# Altium PCB PCB.PcbDoc (part 1 of 2)
Units mm, origin at the board's own origin, x right, y up, seen from the top; angles counter-clockwise.
Board outline 86.36 x 54.61 mm, 4 copper layers (Component Side, Ground Plane, Power Plane, Solder Side), stack 1.226 mm thick; 22 components, 51 nets, 416 pads, 113 vias.
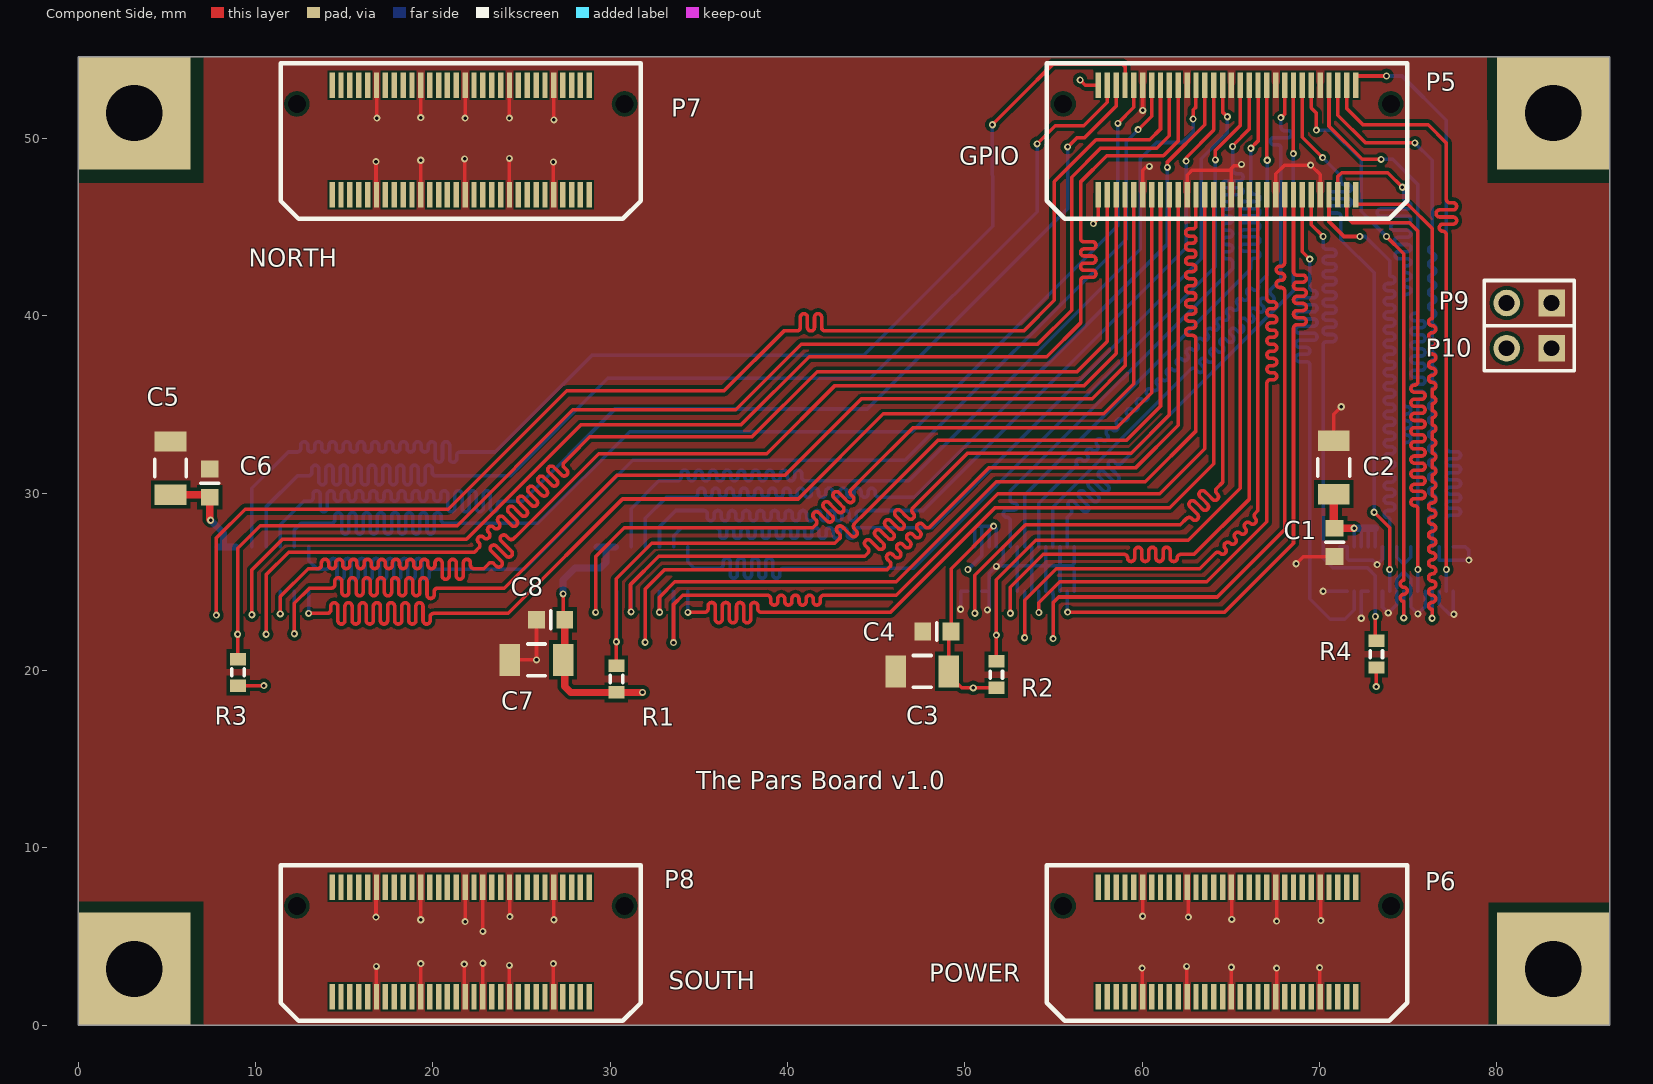
[diagram p0: Component Side view]
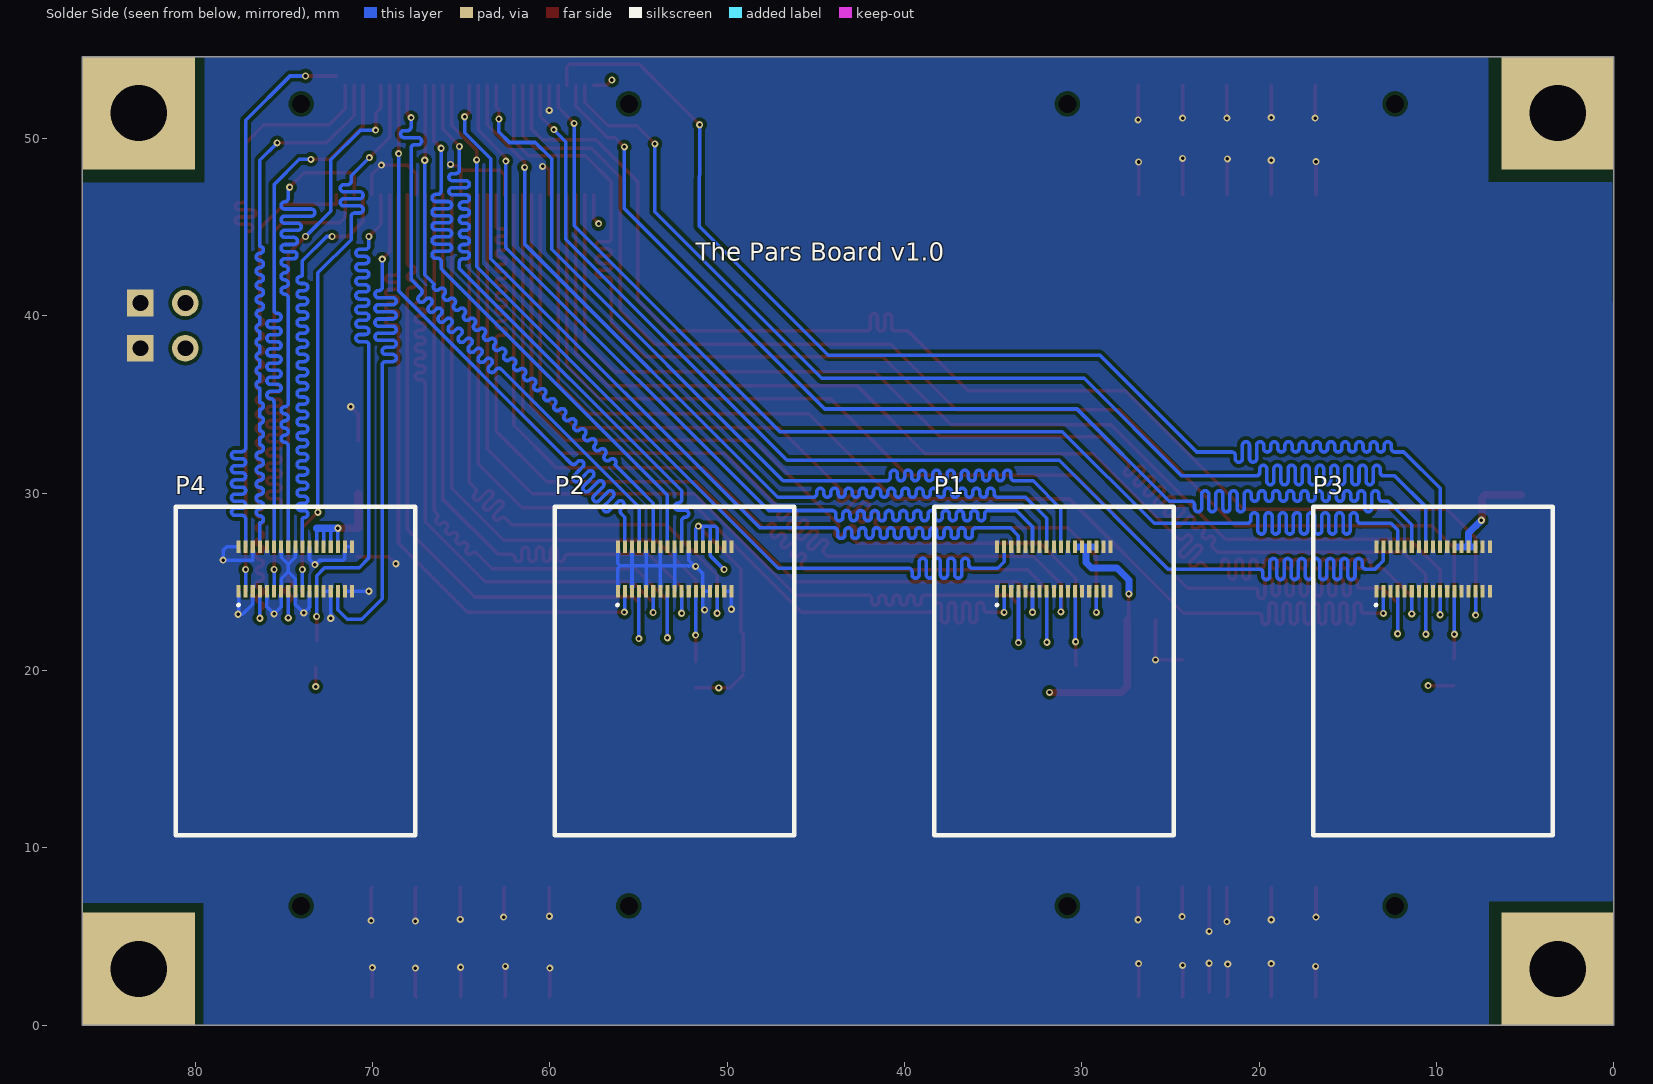
[diagram p1: Solder Side view, seen from below]
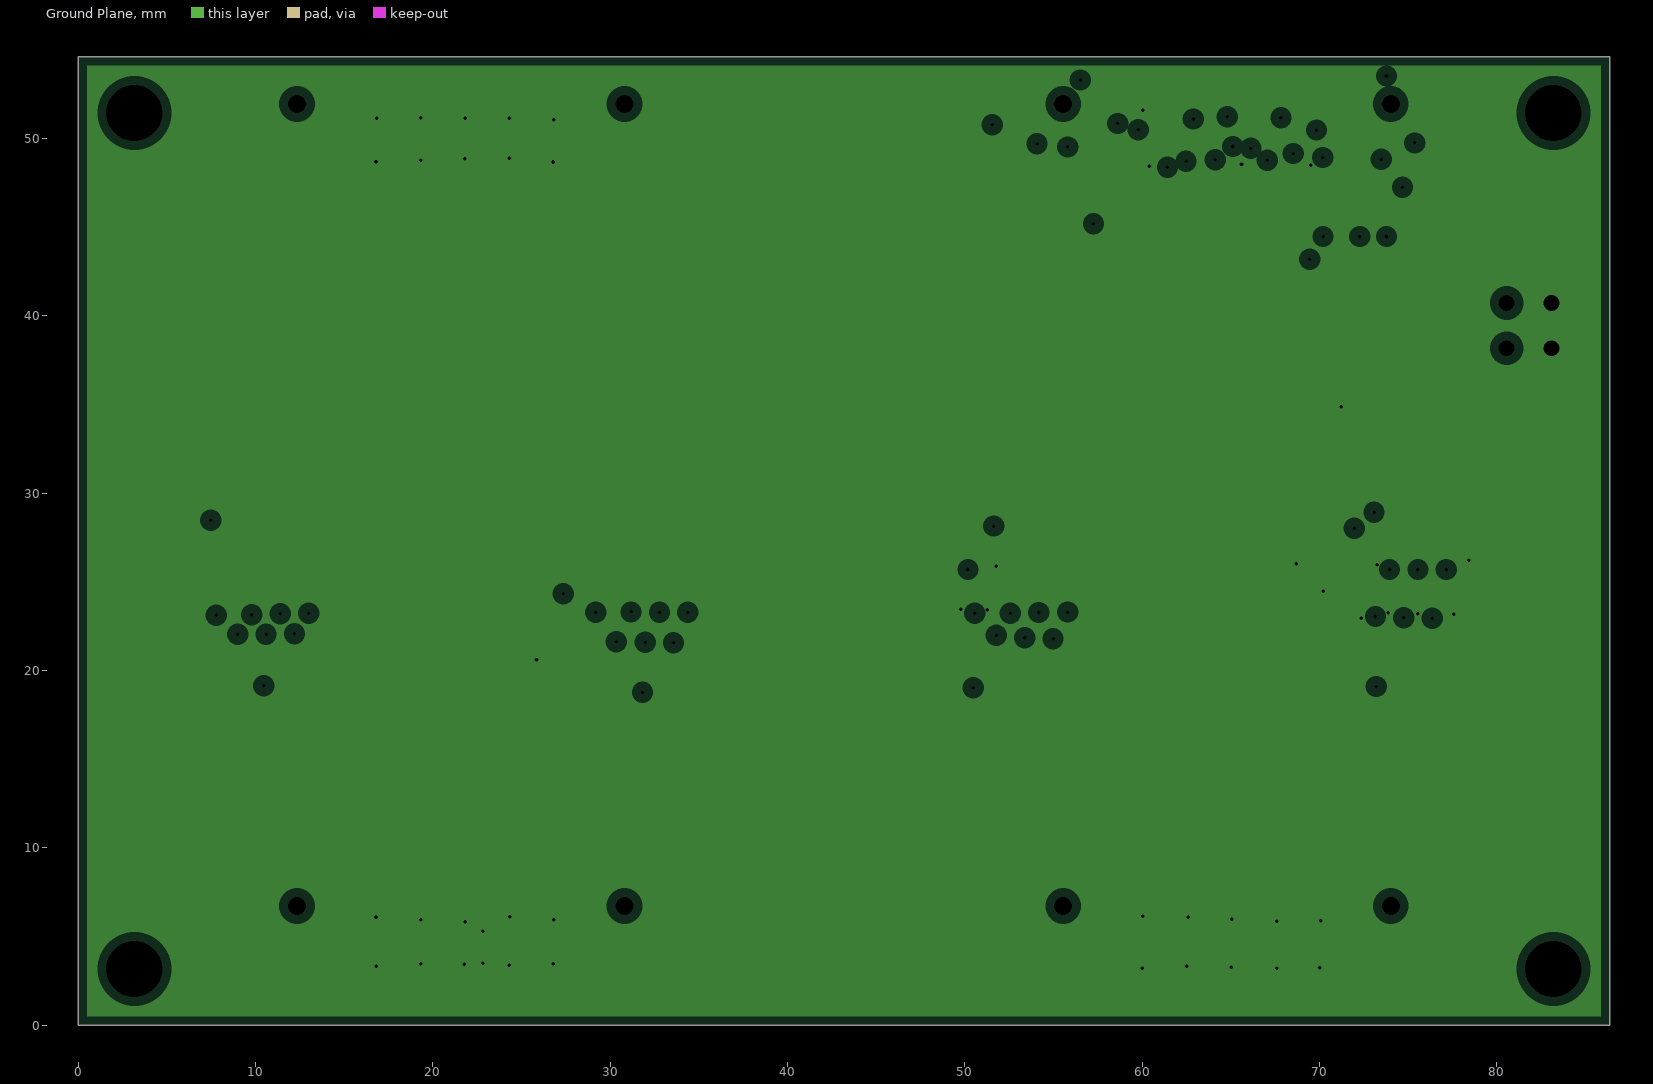
[diagram p2: Ground Plane, clearances drawn from the general rule]
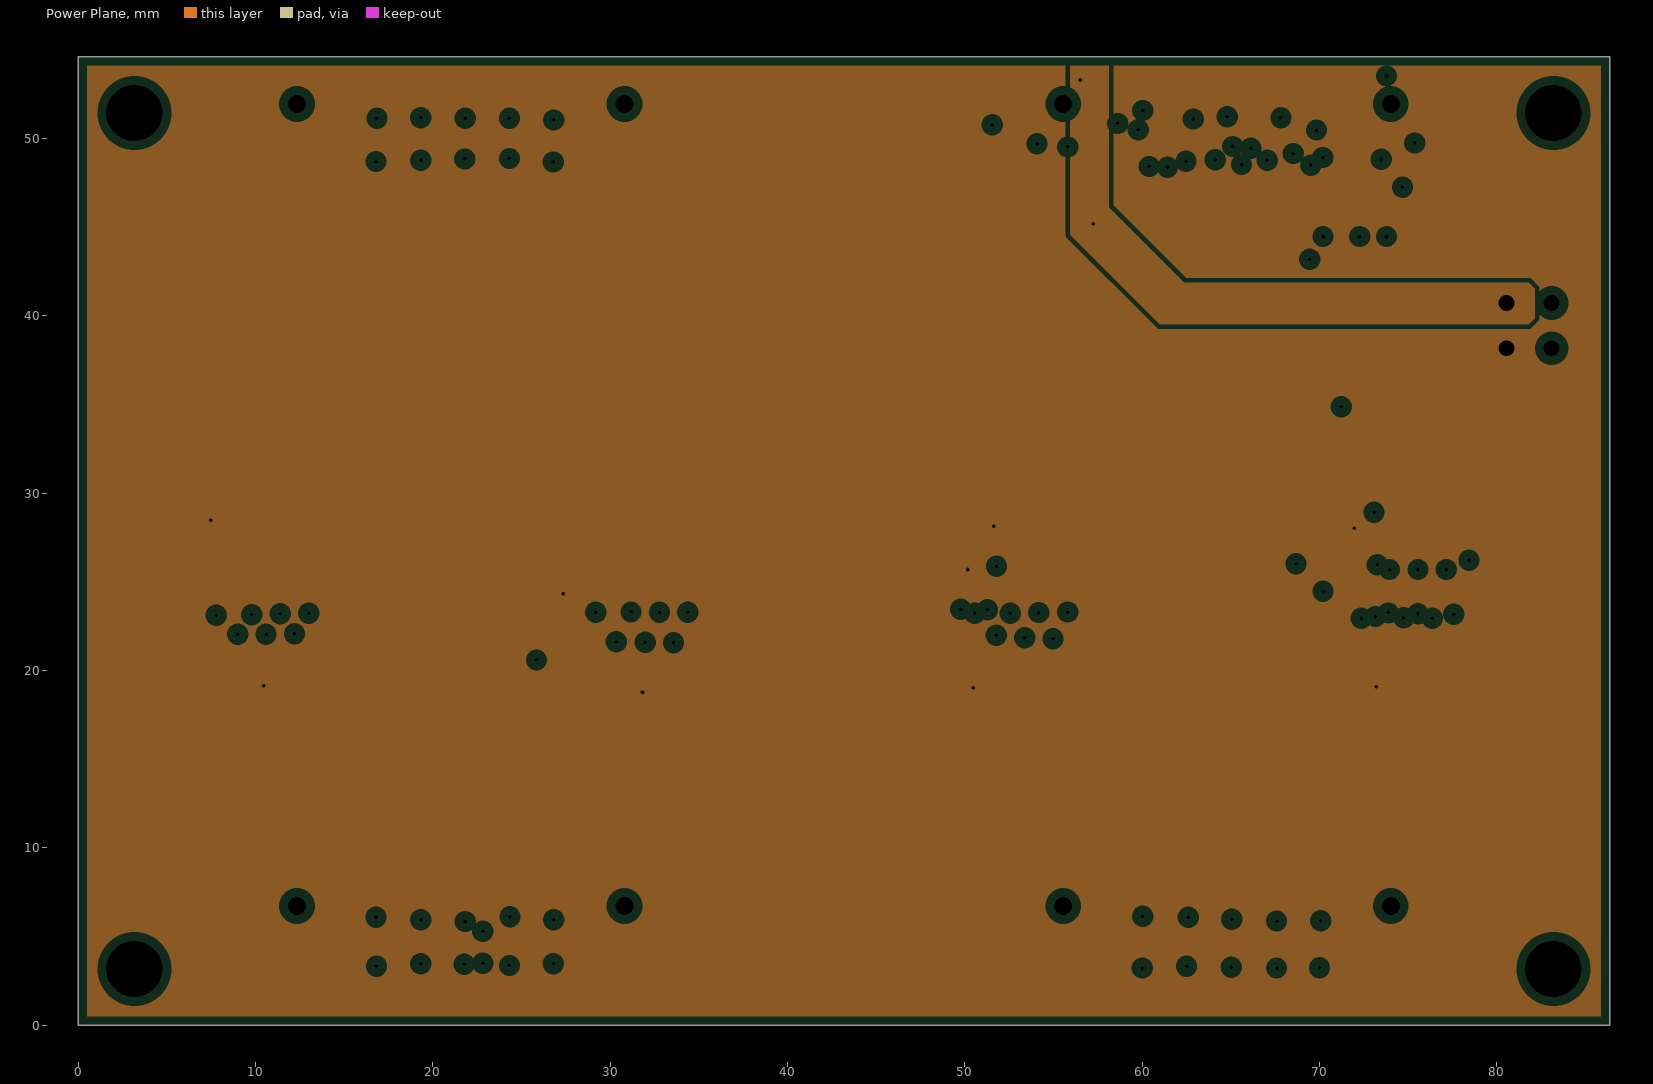
[diagram p3: Power Plane, clearances drawn from the general rule]
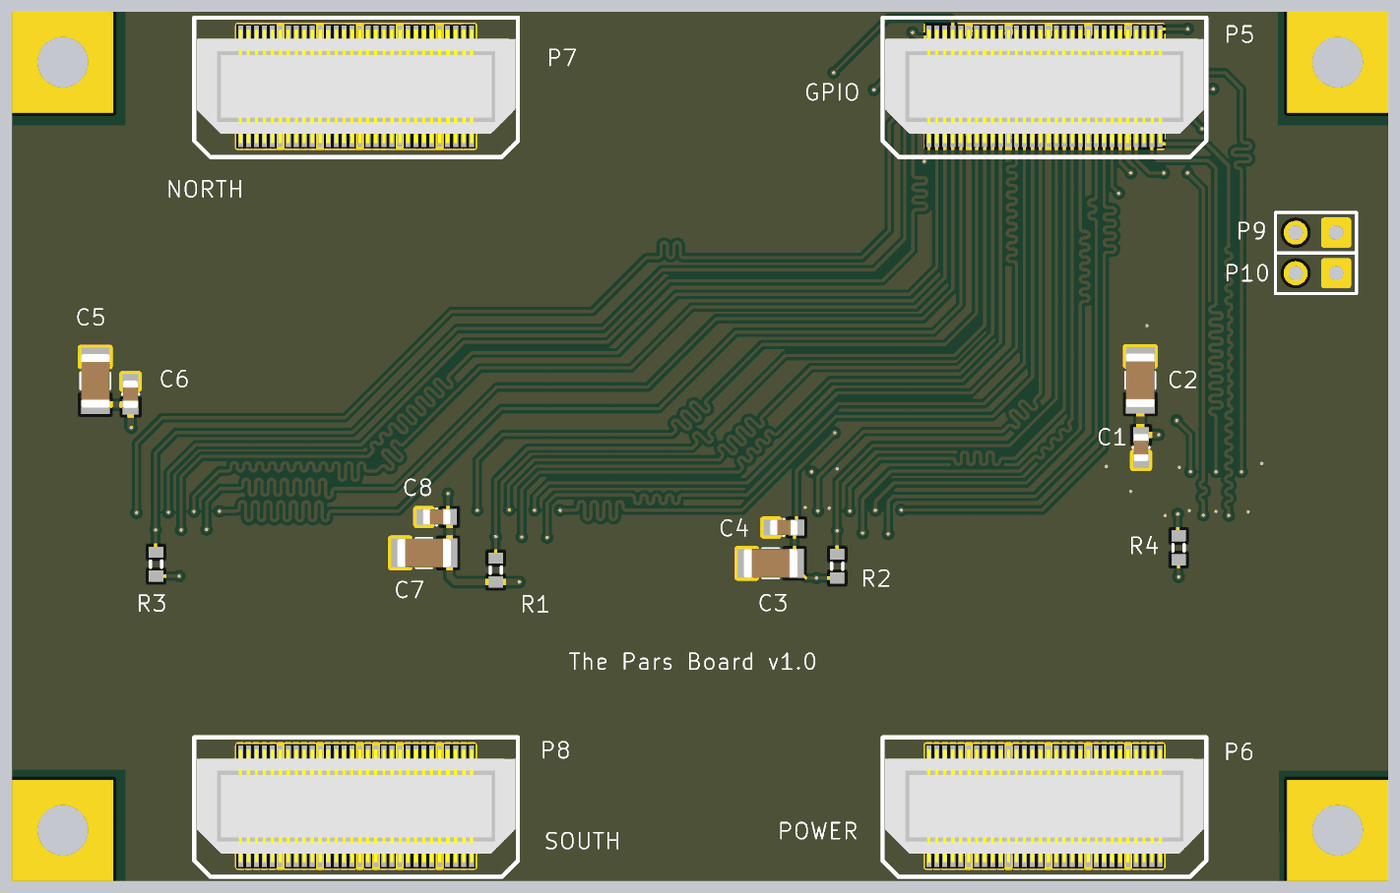
[diagram p5: 3D render of the assembled board from above, using the file's embedded part models]

## Layer stack, top to bottom
Top Solder: solder mask 0.0102, Solder Resist, Dk 3.5
Component Side: signal copper 0.035
Dielectric 1: core 0.32, FR-4, Dk 4.8
Ground Plane: plane copper 0.035, net GND
Dielectric 3: prepreg 0.512, Dk 4.2
Power Plane: plane copper 0.035, net 3.3V
Dielectric 4: core 0.254, FR-4, Dk 4.2
Solder Side: signal copper 0.035
Bottom Solder: solder mask 0.0102, Solder Resist, Dk 3.5

## Board outline
0,0 86.36,0 86.36,54.61 0,54.61

## Design rules (kind name [scope] priority, off if disabled: settings)
Clearance Clearance_2 [(ObjectKind = 'Pad') And (AsMM(PadXSize_AllLayers) = 1.448) And (AsMM(PadYSize_AllLayers) = 0.305)] p1: gap=0.1
Clearance Clearance_1 [(ObjectKind = 'Pad') And (AsMM(PadXSize_AllLayers) = 0.23) And (AsMM(PadYSize_AllLayers) = 0.7)] p2: gap=0.1
Clearance [All] p3: gap=0.2
ComponentClearance ComponentClearance_1 [(Footprint = 'HDR1X2') vs (Footprint = 'HDR1X2')] p1: gap=0 collisioncheckmode=3 verticalgap=0 showdistances=FALSE
ComponentClearance [All] p2: gap=0.254 collisioncheckmode=3 verticalgap=0.2 showdistances=FALSE
FanoutControl Fanout_BGA [IsBGA] p1: bgadir=Out bgaviamode=Closest fanoutstyle=Auto fanoutdirection=Alternating viagrid=0.025 // Fanout_BGA (Default Rule)
FanoutControl Fanout_LCC [IsLCC] p2: bgadir=Out bgaviamode=Closest fanoutstyle=Auto fanoutdirection=Alternating viagrid=0.025 // Fanout_LCC (Default Rule)
FanoutControl Fanout_SOIC [IsSOIC] p3: bgadir=Out bgaviamode=Closest fanoutstyle=Auto fanoutdirection=Alternating viagrid=0.025 // Fanout_SOIC (Default Rule)
FanoutControl Fanout_Small [(CompPinCount < 5)] p4: bgadir=Out bgaviamode=Closest fanoutstyle=Auto fanoutdirection=OutThenIn viagrid=0.025 // Fanout_Small (Default Rule)
FanoutControl Fanout_Default [All] p5: bgadir=Out bgaviamode=Closest fanoutstyle=Auto fanoutdirection=Alternating viagrid=0.025 // Fanout_Default (Default Rule)
HoleSize [All] p1: absolutevalues=TRUE maxlimit=5 minlimit=0.025 maxpercent=80.000 minpercent=20.000
HoleToHoleClearance [All] p1: gap=0.2 allowstackedmicrovias=TRUE
MatchedLengths [InNetClass('SD1')] p1: tolerance=0.1 checknetsindiffpair=TRUE checkdiffpairvsdiffpair=TRUE checkothers=TRUE
MatchedLengths MatchedLengths_1 [InNetClass('SD2')] p2: tolerance=0.1 checknetsindiffpair=TRUE checkdiffpairvsdiffpair=TRUE checkothers=TRUE
MatchedLengths MatchedLengths_2 [InNetClass('SD3')] p3: tolerance=0.1 checknetsindiffpair=TRUE checkdiffpairvsdiffpair=TRUE checkothers=TRUE
MatchedLengths MatchedLengths_3 [InNetClass('SD4')] p4: tolerance=0.1 checknetsindiffpair=TRUE checkdiffpairvsdiffpair=TRUE checkothers=TRUE
MinimumSolderMaskSliver [All] p1: minsoldermaskwidth=0.1
PlaneClearance [All] p1: clearance=0.5
PlaneConnect [All] p1: planeconnectstyle=Direct reliefexpansion=0.508 reliefentries=4 reliefconductorwidth=0.254 reliefairgap=0.254
PolygonConnect [All] p1: connectstyle=Direct reliefconductorwidth=0.254 reliefentries=4 polygonreliefangle="90 Angle" airgapwidth=0.254
RoutingVias [All] p1: holewidth=0.2 width=0.4 viastyle="Through Hole" minholewidth=0.2 minwidth=0.4 maxholewidth=0.2 maxwidth=0.4
SilkToSilkClearance [All] p1: silktosilkclearance=0.2
SilkToSolderMaskClearance SilkToSolderMaskClearance_1 [(ObjectKind = 'Pad') And (AsMM(PadXSize_AllLayers) = 0.9) And (AsMM(PadYSize_AllLayers) = 0.7)] p1: minsilkscreentomaskgap=0 clearancetoexposedcopper=TRUE
SilkToSolderMaskClearance [IsPad] p2: minsilkscreentomaskgap=0.2 clearancetoexposedcopper=TRUE
SolderMaskExpansion [All] p1: expansion=0.2
Width [All] p1: maxlimit=0.5 minlimit=0.2 preferedwidth=0.2
17 further rules are at their usual default settings.

## Classes and differential pairs
net class SD4: RCLK4 SD4CLK SD4CMD SD4DATA0 SD4DATA1 SD4DATA2 SD4DATA3 SD4DATA4 SD4DATA5 SD4DATA6 SD4DATA7 SD4RESET
net class SD3: RCLK3 SD3CLK SD3CMD SD3DATA0 SD3DATA1 SD3DATA2 SD3DATA3 SD3DATA4 SD3DATA5 SD3DATA6 SD3DATA7 SD3RESET
net class SD2: RCLK2 SD2CLK SD2CMD SD2DATA0 SD2DATA1 SD2DATA2 SD2DATA3 SD2DATA4 SD2DATA5 SD2DATA6 SD2DATA7 SD2RESET
net class SD1: RCLK1 SD1CLK SD1CMD SD1DATA0 SD1DATA1 SD1DATA2 SD1DATA3 SD1DATA4 SD1DATA5 SD1DATA6 SD1DATA7 SD1RESET

## Components (designator, comment, footprint, x,y, rotation, side; value= is the part's Value field where it differs from the comment)
C1 "4.7uF" CAPC3216X140N 70.8,31.45 r270 top
C2 "100nF" CAPC1608X87N 70.85,27.225 r90 top
C3 "4.7uF" CAPC3216X140N 47.6,19.95 r0 top
C4 "100nF" CAPC1608X87N 48.425,22.2 r0 top
C5 "4.7uF" CAPC3216X140N 5.213,31.417 r270 top
C6 "100nF" CAPC1608X87N 7.425,30.575 r270 top
C7 "4.7uF" CAPC3216X140N 25.85,20.6 r0 top
C8 "100nF" CAPC1608X87N 26.642,22.862 r0 top
P1 "GB042-34P-H10" GB042-34P-H10 31.583,25.725 r180 bottom
P2 "GB042-34P-H10" GB042-34P-H10 52.967,25.725 r180 bottom
P3 "GB042-34P-H10" GB042-34P-H10 10.2,25.725 r180 bottom
P4 "GB042-34P-H10" GB042-34P-H10 74.35,25.725 r180 bottom
P5 "BTH-030-01-FDA" BTH-030-01-F-D-A 64.782,49.918 r0 top locked
P6 "BTH-030-01-FDA" BTH-030-01-F-D-A 64.782,4.698 r0 top locked
P7 "BTH-030-01-FDA" BTH-030-01-F-D-A 21.578,49.918 r0 top locked
P8 "BTH-030-01-FDA" BTH-030-01-F-D-A 21.578,4.698 r0 top locked
P9 "Header 2" HDR1X2 83.09,40.725 r180 top
P10 "Header 2" HDR1X2 83.09,38.175 r180 top
R1 "Res3" J1-0603 30.35,19.525 r90 top
R2 "Res3" J1-0603 51.775,19.775 r90 top
R3 "Res3" J1-0603 9.025,19.9 r90 top
R4 "Res3" J1-0603 73.2,20.925 r90 top

## Footprints (in the part's own frame and the unit in brackets; to place one, negate y for a bottom-side part, rotate by r counter-clockwise, add the part's x,y. Pads: shape width x height; smd on the part's side, far side on the other; paste and mask are expansions set on the pad)
BTH-030-01-F-D-A [mm]
  round 0.8 hole 1.016 unplated mask+0.358: 0(-9.238,2.032) 0(9.238,2.032)
  rect 0.305x1.448 smd: 1(-7.25,3.086) 2(-7.25,-3.086) 3(-6.75,3.086) 4(-6.75,-3.086) 5(-6.25,3.086) 6(-6.25,-3.086) 7(-5.75,3.086) 8(-5.75,-3.086) 9(-5.25,3.086) 10(-5.25,-3.086) 11(-4.75,3.086) 12(-4.75,-3.086) 13(-4.25,3.086) 14(-4.25,-3.086) 15(-3.75,3.086) 16(-3.75,-3.086) 17(-3.25,3.086) 18(-3.25,-3.086) 19(-2.75,3.086) 20(-2.75,-3.086) 21(-2.25,3.086) 22(-2.25,-3.086) 23(-1.75,3.086) 24(-1.75,-3.086) 25(-1.25,3.086) 26(-1.25,-3.086) 27(-0.75,3.086) 28(-0.75,-3.086) 29(-0.25,3.086) 30(-0.25,-3.086) 31(0.25,3.086) 32(0.25,-3.086) 33(0.75,3.086) 34(0.75,-3.086) 35(1.25,3.086) 36(1.25,-3.086) 37(1.75,3.086) 38(1.75,-3.086) 39(2.25,3.086) 40(2.25,-3.086) 41(2.75,3.086) 42(2.75,-3.086) 43(3.25,3.086) 44(3.25,-3.086) 45(3.75,3.086) 46(3.75,-3.086) 47(4.25,3.086) 48(4.25,-3.086) 49(4.75,3.086) 50(4.75,-3.086) 51(5.25,3.086) 52(5.25,-3.086) 53(5.75,3.086) 54(5.75,-3.086) 55(6.25,3.086) 56(6.25,-3.086) 57(6.75,3.086) 58(6.75,-3.086) 59(7.25,3.086) 60(7.25,-3.086)
  silkscreen extent -10.16,-4.45 10.16,4.32, body extent -10,-3.56 10,3.56, height 4.27
CAPC1608X87N [mm] "Chip Capacitor, Body 1.6x0.8mm IPC Medium Density"
  rect 0.95x1 smd: 1(-0.8,0) 2(0.8,0)
  silkscreen extent 0,-0.5 0,0.5, body extent -0.87,-0.47 0.88,0.48, height 0.87
CAPC3216X140N [mm] "Chip Capacitor, Body 3.2x1.6mm, IPC Medium Density"
  rect 1.15x1.8 smd: 1(-1.5,0) 2(1.5,0)
  silkscreen extent -0.5,-0.9 0.5,0.9, body extent -1.7,-0.9 1.7,0.9, height 1.4
GB042-34P-H10 [mm]
  rect 0.23x0.7 smd: 1(-3.2,-1.25) 2(-2.8,-1.25) 3(-2.4,-1.25) 4(-2,-1.25) 5(-1.6,-1.25) 6(-1.2,-1.25) 7(-0.8,-1.25) 8(-0.4,-1.25) 9(0,-1.25) 10(0.4,-1.25) 11(0.8,-1.25) 12(1.2,-1.25) 13(1.6,-1.25) 14(2,-1.25) 15(2.4,-1.25) 16(2.8,-1.25) 17(3.2,-1.25) 18(3.2,1.25) 19(2.8,1.25) 20(2.4,1.25) 21(2,1.25) 22(1.6,1.25) 23(1.2,1.25) 24(0.8,1.25) 25(0.4,1.25) 26(0,1.25) 27(-0.4,1.25) 28(-0.8,1.25) 29(-1.2,1.25) 30(-1.6,1.25) 31(-2,1.25) 32(-2.4,1.25) 33(-2.8,1.25) 34(-3.2,1.25)
  silkscreen extent -6.75,-15 6.75,3.5
HDR1X2 [mm] "Connector; Header; 2 Position"
  rect 1.5x1.5 hole 0.9: 1(0,0)
  round 1.5 hole 0.9: 2(2.54,0)
  silkscreen extent -1.27,-1.27 3.81,1.27
J1-0603 [mm] "Chip Resistor, Body 1.6x0.8mm, IPC High Density"
  rect 0.7x0.9 smd: 1(-0.75,0) 2(0.75,0)
  silkscreen extent -0.2,-0.35 0.2,0.35, body extent -0.85,-0.48 0.85,0.48, height 0.9

## Part data
C1 C3 C5 C7: library part CC1206_4.7UF_16V_10%_X5R, "Non-polarised capacitor"
C2 C4 C6 C8: library part CC0603_100NF_50V_10%_X7R, "Non-polarised capacitor"
P9 P10: "Header, 2-Pin"
R1 R2 R3 R4: "Resistor"

## Free pads (board coordinates)
  rect 6.35x6.35 hole 3.175: 1(3.175,3.175) 1(3.175,51.435) 1(83.185,3.175) 1(83.185,51.435)

## Via types
v1: diameter 0.4, hole 0.2, Component Side to Solder Side, tented both sides, 113 vias

## Nets (pads, with @x,y where several pads share a name; then routed paths per layer and width w, separated by ;. In a path a pad name is that pad's centre, name@x,y a point inside that pad or via, vN(x,y) a via of type N, cw(c..) or ccw(c..) an arc to the next point about the centre after c; other vN are vias at no path point)
3.3V: C1.2 C2.2 C3.2 C4.2 C5.2 C6.2 C7.2 C8.2 P1.20 P1.21 P1.22 P1.23 P2.20 P2.21 P2.22 P2.23 P3.20 P3.21 P3.22 P3.23 P4.20 P4.21 P4.22 P4.23 P10.2 R1.1 R2.1 R3.1 R4.1 | length 52.6
  Component Side w0.2: R3.1@9.025,19.15 v1(10.475,19.15) ; v1(27.35,24.325) 27.35,22.954 C8.2@27.442,22.862 ; C3.2@49.1,19.75 49.825,19.025 v1(50.475,19.025) R2.1@51.775,19.025 ; C3.2@49.1,19.95 C4.2@49.1,22.075 ; C4.2@49.225,22.2 49.225,25.75 v1(51.625,28.15) ; C2.2@70.8,28.075 C2.2@70.85,28.025 ; v1(73.2,19.1) R4.1@73.2,20.175
  Component Side w0.4: C5.2@5.213,29.917 C6.2@7.283,29.917 ; C6.2@7.425,29.775 7.425,28.525 v1(7.475,28.475) ; C8.2@27.442,22.862 27.442,19.108 27.775,18.775 R1.1@30.35,18.775 v1(31.825,18.775) ; C2.2@70.85,28.025 v1(71.95,28.025)
  Component Side w0.5: C2.2@70.8,28.075 C1.2@70.8,29.95
  Solder Side w0.2: P1.23@30.3,26.975 P1.22@29.983,26.975 P1.23@30.383,26.975 ; v1(50.175,25.7) 50.967,26.492 P2.21@50.967,26.975 50.967,28.142 50.975,28.15 ; P2.20@50.567,26.975 50.567,28.017 50.7,28.15 50.975,28.15 ; P2.22@51.367,26.975 51.367,28.133 51.35,28.15 ; P2.23@51.767,26.975 51.767,28.008 v1(51.625,28.15) 51.35,28.15 ; P4.20@71.95,26.975 v1(71.95,28.025) ; 72.325,28.025 72.35,28 P4.21@72.35,26.975 ; P4.22@72.75,26.975 72.75,28.013 ; P4.23@73.15,26.975 73.15,28.025 ; 50.975,28.15 51.35,28.15
  Solder Side w0.4: v1(7.475,28.475) 8.2,27.75 P3.21@8.2,26.975 ; P3.20@7.9,26.975 P3.21@8.2,26.975 ; P3.23@8.9,26.975 P3.22@8.6,26.975 P3.21@8.2,26.975 ; v1(27.35,24.325) 27.35,25.1 28.025,25.775 29.45,25.775 29.775,26.1 29.775,26.975 ; P1.20@29.275,26.975 29.775,26.975 ; P1.23@30.3,26.975 29.775,26.975 ; v1(71.95,28.025) 72.325,28.025 73.15,28.025
GND: C1.1 C2.1 C3.1 C4.1 C5.1 C6.1 C7.1 C8.1 P1.1 P1.3 P1.5 P1.7 P1.9 P1.11 P1.13 P1.14 P1.16 P1.17 P1.18 P1.19 P1.24 P1.26 P1.28 P1.30 P1.32 P1.34 P2.1 P2.3 P2.5 P2.7 P2.9 P2.11 P2.13 P2.14 P2.16 P2.17 P2.18 P2.19 P2.24 P2.26 P2.28 P2.30 P2.32 P2.34 P3.1 P3.3 P3.5 P3.7 P3.9 P3.11 P3.13 P3.14 P3.16 P3.17 P3.18 P3.19 P3.24 P3.26 P3.28 P3.30 P3.32 P3.34 P4.1 P4.3 P4.5 P4.7 P4.9 P4.11 P4.13 P4.14 P4.16 P4.17 P4.18 P4.19 P4.24 P4.26 P4.28 P4.30 P4.32 P4.34 P5.11 P5.12 P5.21 P5.22 P5.31 P5.32 P5.41 P5.42 P5.51 P5.52 P6.11 P6.12 P6.21 P6.22 P6.31 P6.32 P6.41 P6.42 P6.51 P6.52 P7.11 P7.12 P7.21 P7.22 P7.31 P7.32 P7.41 P7.42 P7.51 P7.52 P8.11 P8.12 P8.21 P8.22 P8.31 P8.32 P8.35 P8.36 P8.41 P8.42 P8.51 P8.52 P9.1 P10.1 | length 129
  Component Side w0.2: v1(16.8,6.1) 16.8,7.756 P8.11@16.828,7.784 ; v1(16.8,48.7) 16.8,46.86 P7.12@16.828,46.832 ; v1(16.825,3.325) 16.825,1.615 P8.12@16.828,1.612 ; P7.11@16.828,53.004 16.85,52.982 v1(16.85,51.15) ; v1(19.325,3.475) 19.325,1.615 P8.22@19.328,1.612 ; v1(19.325,5.95) 19.325,7.781 P8.21@19.328,7.784 ; v1(19.325,48.775) 19.325,46.835 P7.22@19.328,46.832 ; v1(19.325,51.175) 19.325,53.001 P7.21@19.328,53.004 ; v1(21.775,3.45) 21.775,1.665 P8.32@21.828,1.612 ; v1(21.8,48.85) 21.8,46.86 P7.32@21.828,46.832 ; v1(21.825,5.85) 21.825,7.781 P8.31@21.828,7.784 ; v1(21.825,51.15) 21.825,53.001 P7.31@21.828,53.004 ; P8.36@22.825,1.865 v1(22.825,3.5) ; v1(22.825,5.3) 22.825,7.781 P8.35@22.828,7.784 ; v1(24.325,3.375) 24.325,1.615 P8.42@24.328,1.612 ; v1(24.325,48.875) 24.325,46.835 P7.42@24.328,46.832 ; v1(24.325,51.15) 24.325,53.001 P7.41@24.328,53.004 ; P8.41@24.328,7.784 24.35,7.762 v1(24.35,6.125) ; C7.1@24.35,20.6 v1(25.85,20.6) 25.85,22.854 C8.1@25.842,22.862 ; v1(26.8,3.475) 26.8,1.64 P8.52@26.828,1.612 ; v1(26.8,48.675) 26.8,46.86 P7.52@26.828,46.832 ; v1(26.825,5.95) 26.825,7.781 P8.51@26.828,7.784 ; v1(26.825,51.05) 26.825,53.001 P7.51@26.828,53.004 ; v1@51.7,25.85 51.725,25.875 v1(51.782,25.875) ; v1(60,3.225) 60,1.644 P6.12@60.032,1.612 ; v1(60.025,6.15) 60.025,7.777 P6.11@60.032,7.784 ; P5.12@60.032,46.832 60.032,48.207 60.252,48.427 v1(60.403,48.427) ; v1(60.032,51.582) P5.11@60.032,53.004 ; v1(62.5,3.325) 62.5,1.644 P6.22@62.532,1.612 ; P6.21@62.532,7.784 62.6,7.716 v1(62.6,6.1) ; P5.22@62.532,46.832 62.532,47.932 62.8,48.2 65.032,48.2 ; v1(65.025,3.275) 65.025,1.619 P6.32@65.032,1.612 ; P6.31@65.032,7.784 65.05,7.766 v1(65.05,5.975) ; P5.32@65.032,46.832 65.032,48.318 65.19,48.475 65.536,48.475 v1(65.6,48.539) ; P6.42@67.532,1.612 67.575,1.655 v1(67.575,3.225) ; P6.41@67.532,7.784 67.575,7.741 v1(67.575,5.875) ; P5.42@67.532,46.832 67.532,48.007 68.025,48.5 v1(69.5,48.5) 70.032,47.968 P5.52@70.032,46.832 ; v1(68.675,26.025) 69.075,26.425 C2.1@70.85,26.425 ; v1(70,3.25) 70,1.644 P6.52@70.032,1.612 ; P6.51@70.032,7.784 70.075,7.741 v1(70.075,5.9) ; C1.1@70.8,32.95 70.8,34.45 v1(71.225,34.875)
  Solder Side w0.2: v1(49.767,23.458) P2.17@49.767,24.475 P2.16@50.167,24.475 ; P2.14@50.967,24.475 P2.13@51.367,24.475 ; v1(51.275,23.425) 51.367,23.517 P2.13@51.367,24.475 ; 52.167,25.895 52.175,25.904 ; P2.24@52.167,26.975 52.167,26.217 v1@51.854,25.904 ; P2.9@52.967,24.475 52.967,25.904 ; P2.26@52.967,26.975 52.967,25.904 ; P2.7@53.767,24.475 53.767,25.887 53.75,25.904 ; P2.28@53.767,26.975 53.767,25.92 53.75,25.904 ; P2.5@54.567,24.475 54.567,25.887 54.55,25.904 ; P2.30@54.567,26.975 54.567,25.92 54.55,25.904 ; P2.3@55.367,24.475 55.367,25.887 55.35,25.904 ; P2.32@55.367,26.975 55.367,25.92 55.35,25.904 ; P2.1@56.167,24.475 56.167,25.765 56.029,25.904 ; P2.34@56.167,26.975 56.167,26.042 56.029,25.904 ; v1@60.35,48.425 60.401,48.425 v1(60.403,48.427) ; v1@65.55,48.45 65.6,48.5 v1(65.6,48.539) ; v1(70.2,24.475) P4.17@71.15,24.475 P4.16@71.55,24.475 ; P4.18@71.15,26.975 P4.19@71.55,26.975 71.55,26.325 71.65,26.225 73,26.225 v1(73.25,25.975) 73.55,26.275 P4.24@73.55,26.975 ; v1(72.35,22.95) P4.14@72.35,24.475 P4.13@72.75,24.475 ; P4.11@73.55,24.475 73.55,23.575 v1(73.875,23.25) 74.35,23.725 P4.9@74.35,24.475 ; P4.9@74.35,24.641 74.35,25.175 74.75,25.575 ; P4.26@74.35,26.975 74.35,26.4 74.75,26 ; P4.28@75.15,26.975 75.15,26.4 74.75,26 ; P4.5@75.95,24.475 75.95,23.6 v1(75.55,23.2) 75.15,23.6 P4.7@75.15,24.475 75.15,25.175 74.75,25.575 ; P4.3@76.75,24.475 76.75,23.75 77.325,23.175 v1(77.575,23.175) 77.55,23.2 P4.1@77.55,24.475 ; P4.32@76.75,26.975 76.75,26.225 v1(78.425,26.225) 78.425,26.775 78.225,26.975 P4.34@77.55,26.975 ; P2.13@51.367,24.475 51.367,25.46 v1(51.782,25.875) 51.811,25.904 v1@51.854,25.904 ; v1@51.854,25.904 52.175,25.904 ; 52.175,25.904 52.967,25.904 ; 52.967,25.904 53.75,25.904 ; 53.75,25.904 54.55,25.904 ; 54.55,25.904 55.35,25.904 ; 55.35,25.904 56.029,25.904 ; 74.75,25.575 74.75,26
RCLK1: P3.15 P5.15 | length 78.1
  Component Side w0.2: v1(7.8,23.125) 7.8,27.475 9.425,29.1 20.875,29.1 27.55,35.775 36.425,35.775 39.8,39.15 40.525,39.15 ccw(c40.525,39.35) 40.725,39.35 40.725,39.925 cw(c40.925,39.925) 40.925,40.125 cw(c40.925,39.925) 41.125,39.925 41.125,39.35 ccw(c41.325,39.35) 41.325,39.15 ccw(c41.325,39.35) 41.525,39.35 41.525,39.925 cw(c41.725,39.925) 41.725,40.125 cw(c41.725,39.925) 41.925,39.925 41.925,39.35 ccw(c42.125,39.35) 42.125,39.15 49.425,39.15 53.325,39.15 55.05,40.875 55.05,47.575 57.4,49.925 60.425,49.925 61.032,50.532 P5.15@61.032,53.004
  Solder Side w0.2: v1(7.8,23.125) P3.15@7.8,24.475
RCLK2: P2.15 P5.30 | length 39.6
  Component Side w0.2: v1(50.567,23.233) 50.567,25.367 53.425,28.225 62.15,28.225 62.503,28.578 cw(c62.644,28.437) 62.786,28.578 62.833,28.53 ccw(c62.975,28.672) 63.116,28.53 ccw(c62.975,28.672) 63.116,28.813 62.927,29.002 62.694,29.236 cw(c62.835,29.377) 62.694,29.519 cw(c62.835,29.377) 62.976,29.519 63.21,29.285 63.399,29.096 ccw(c63.541,29.237) 63.682,29.096 ccw(c63.541,29.237) 63.682,29.379 63.493,29.568 63.259,29.802 cw(c63.401,29.943) 63.259,30.084 cw(c63.401,29.943) 63.542,30.084 63.776,29.851 63.965,29.662 ccw(c64.106,29.803) 64.248,29.662 ccw(c64.106,29.803) 64.248,29.945 64.2,29.992 cw(c64.341,30.134) 64.2,30.275 64.532,30.607 P5.30@64.532,46.832
  Solder Side w0.2: v1(50.567,23.233) P2.15@50.567,24.475
RCLK3: P1.15 P5.14 | length 56.1
  Component Side w0.2: v1(29.183,23.283) 29.183,26.433 30.8,28.05 41.425,28.05 41.6,28.225 ccw(c41.459,28.366) 41.6,28.508 41.489,28.619 cw(c41.63,28.76) 41.489,28.902 cw(c41.63,28.76) 41.772,28.902 42.024,28.649 42.245,28.428 ccw(c42.387,28.57) 42.528,28.428 ccw(c42.387,28.57) 42.528,28.711 42.307,28.932 42.055,29.184 cw(c42.196,29.326) 42.055,29.467 cw(c42.196,29.326) 42.338,29.467 42.59,29.215 42.842,28.963 ccw(c42.984,29.104) 43.125,28.963 ccw(c42.984,29.104) 43.125,29.245 42.873,29.498 42.62,29.75 cw(c42.762,29.892) 42.62,30.033 cw(c42.762,29.892) 42.903,30.033 43.156,29.781 43.408,29.528 ccw(c43.549,29.67) 43.691,29.528 ccw(c43.549,29.67) 43.691,29.811 43.58,29.922 cw(c43.721,30.063) 43.58,30.205 44.5,31.125 47.075,33.7 58.575,33.7 60.532,35.657 P5.14@60.532,46.832
  Solder Side w0.2: v1(29.183,23.283) P1.15@29.183,24.475
RCLK4: P4.15 P5.48 | length 36.5
  Component Side w0.2: P5.48@69.032,46.832 69.025,46.825 69.025,43.625 v1(69.45,43.2)
  Solder Side w0.2: v1(69.45,43.2) 69.45,41.625 ccw(c69.65,41.625) 69.65,41.425 69.659,41.425 cw(c69.659,41.225) 69.859,41.225 cw(c69.659,41.225) 69.659,41.025 69.45,41.025 68.86,41.025 ccw(c68.86,40.825) 68.66,40.825 ccw(c68.86,40.825) 68.86,40.625 69.45,40.625 69.659,40.625 cw(c69.659,40.425) 69.859,40.425 cw(c69.659,40.425) 69.659,40.225 69.45,40.225 68.86,40.225 ccw(c68.86,40.025) 68.66,40.025 ccw(c68.86,40.025) 68.86,39.825 69.45,39.825 69.659,39.825 cw(c69.659,39.625) 69.859,39.625 cw(c69.659,39.625) 69.659,39.425 69.45,39.425 68.86,39.425 ccw(c68.86,39.225) 68.66,39.225 ccw(c68.86,39.225) 68.86,39.025 69.45,39.025 69.659,39.025 cw(c69.659,38.825) 69.859,38.825 cw(c69.659,38.825) 69.659,38.625 69.45,38.625 68.86,38.625 ccw(c68.86,38.425) 68.66,38.425 ccw(c68.86,38.425) 68.86,38.225 69.25,38.225 cw(c69.25,38.025) 69.45,38.025 cw(c69.25,38.025) 69.25,37.825 68.86,37.825 ccw(c68.86,37.625) 68.66,37.625 ccw(c68.86,37.625) 68.86,37.425 69.25,37.425 cw(c69.25,37.225) 69.45,37.225 69.45,34.25 69.45,24.05 70.6,22.9 71.425,22.9 71.95,23.425 P4.15@71.95,24.475
SD1CLK: P3.8 P5.4 | length 78.1
  Component Side w0.2: v1(10.6,22.05) 10.6,25.4 11.875,26.675 22.35,26.675 22.6,26.925 ccw(c22.459,27.066) 22.6,27.208 22.579,27.229 cw(c22.72,27.371) 22.579,27.512 cw(c22.72,27.371) 22.861,27.512 22.883,27.491 ccw(c23.024,27.632) 23.166,27.491 ccw(c23.024,27.632) 23.166,27.774 23.144,27.795 cw(c23.286,27.936) 23.144,28.078 cw(c23.286,27.936) 23.427,28.078 23.449,28.056 ccw(c23.59,28.198) 23.731,28.056 ccw(c23.59,28.198) 23.731,28.339 23.71,28.361 cw(c23.851,28.502) 23.71,28.643 cw(c23.851,28.502) 23.993,28.643 24.156,28.481 24.438,28.198 ccw(c24.579,28.34) 24.721,28.198 ccw(c24.579,28.34) 24.721,28.481 24.438,28.763 24.276,28.926 cw(c24.417,29.068) 24.276,29.209 cw(c24.417,29.068) 24.558,29.209 24.721,29.046 25.004,28.764 ccw(c25.145,28.905) 25.287,28.764 ccw(c25.145,28.905) 25.287,29.047 25.004,29.329 24.841,29.492 cw(c24.983,29.633) 24.841,29.775 cw(c24.983,29.633) 25.124,29.775 25.287,29.612 25.569,29.33 ccw(c25.711,29.471) 25.852,29.33 ccw(c25.711,29.471) 25.852,29.612 25.57,29.895 25.407,30.058 cw(c25.548,30.199) 25.407,30.341 cw(c25.548,30.199) 25.69,30.341 25.853,30.178 26.135,29.895 ccw(c26.277,30.037) 26.418,29.895 ccw(c26.277,30.037) 26.418,30.178 26.136,30.461 25.973,30.623 cw(c26.114,30.765) 25.973,30.906 cw(c26.114,30.765) 26.256,30.906 26.418,30.743 26.701,30.461 ccw(c26.842,30.602) 26.984,30.461 ccw(c26.842,30.602) 26.984,30.744 26.701,31.026 26.538,31.189 cw(c26.68,31.33) 26.538,31.472 cw(c26.68,31.33) 26.821,31.472 26.984,31.309 27.266,31.027 ccw(c27.408,31.168) 27.549,31.027 ccw(c27.408,31.168) 27.549,31.309 27.408,31.45 cw(c27.55,31.592) 27.408,31.733 27.75,32.075 28.85,33.175 38,33.175 41.675,36.85 56.325,36.85 58.032,38.557 P5.4@58.032,46.832
  Solder Side w0.2: v1(10.6,22.05) P3.8@10.6,24.475
SD1CMD: P3.25 P5.7 | length 78.1
  Component Side w0.2: v1(51.55,50.775) 53.187,52.413 ; 53.125,52.35 54.975,54.2 58.875,54.2 59.032,54.043 P5.7@59.032,53.004
  Solder Side w0.2: P3.25@9.8,26.975 9.8,30.275 11.85,32.325 12.35,32.325 ccw(c12.35,32.525) 12.55,32.525 12.55,32.703 cw(c12.75,32.703) 12.75,32.903 cw(c12.75,32.703) 12.95,32.703 12.95,32.525 ccw(c13.15,32.525) 13.15,32.325 ccw(c13.15,32.525) 13.35,32.525 13.35,32.703 cw(c13.55,32.703) 13.55,32.903 cw(c13.55,32.703) 13.75,32.703 13.75,32.525 ccw(c13.95,32.525) 13.95,32.325 ccw(c13.95,32.525) 14.15,32.525 14.15,32.703 cw(c14.35,32.703) 14.35,32.903 cw(c14.35,32.703) 14.55,32.703 14.55,32.525 ccw(c14.75,32.525) 14.75,32.325 ccw(c14.75,32.525) 14.95,32.525 14.95,32.703 cw(c15.15,32.703) 15.15,32.903 cw(c15.15,32.703) 15.35,32.703 15.35,32.525 ccw(c15.55,32.525) 15.55,32.325 ccw(c15.55,32.525) 15.75,32.525 15.75,32.703 cw(c15.95,32.703) 15.95,32.903 cw(c15.95,32.703) 16.15,32.703 16.15,32.525 ccw(c16.35,32.525) 16.35,32.325 ccw(c16.35,32.525) 16.55,32.525 16.55,32.703 cw(c16.75,32.703) 16.75,32.903 cw(c16.75,32.703) 16.95,32.703 16.95,32.525 ccw(c17.15,32.525) 17.15,32.325 ccw(c17.15,32.525) 17.35,32.525 17.35,32.703 cw(c17.55,32.703) 17.55,32.903 cw(c17.55,32.703) 17.75,32.703 17.75,32.525 ccw(c17.95,32.525) 17.95,32.325 ccw(c17.95,32.525) 18.15,32.525 18.15,32.703 cw(c18.35,32.703) 18.35,32.903 cw(c18.35,32.703) 18.55,32.703 18.55,32.525 ccw(c18.75,32.525) 18.75,32.325 ccw(c18.75,32.525) 18.95,32.525 18.95,32.703 cw(c19.15,32.703) 19.15,32.903 cw(c19.15,32.703) 19.35,32.703 19.35,32.525 ccw(c19.55,32.525) 19.55,32.325 ccw(c19.55,32.525) 19.75,32.525 19.75,32.703 cw(c19.95,32.703) 19.95,32.903 cw(c19.95,32.703) 20.15,32.703 20.15,32.325 20.15,31.953 ccw(c20.35,31.953) 20.35,31.753 ccw(c20.35,31.953) 20.55,31.953 20.55,32.325 20.55,32.703 cw(c20.75,32.703) 20.75,32.903 cw(c20.75,32.703) 20.95,32.703 20.95,32.325 20.95,31.947 ccw(c21.15,31.947) 21.15,31.747 ccw(c21.15,31.947) 21.35,31.947 21.35,32.125 cw(c21.55,32.125) 21.55,32.325 22.975,32.325 23.525,32.325 28.975,37.775 44.3,37.775 51.575,45.05 v1(51.55,50.775)
SD1DATA0: P3.6 P5.6 | length 78.1
  Component Side w0.2: v1(11.4,23.2) 11.4,24.175 12.975,25.75 13.525,25.75 ccw(c13.525,25.95) 13.725,25.95 13.725,26.074 cw(c13.925,26.074) 13.925,26.274 cw(c13.925,26.074) 14.125,26.074 14.125,25.95 ccw(c14.325,25.95) 14.325,25.75 ccw(c14.325,25.95) 14.525,25.95 14.525,26.074 cw(c14.725,26.074) 14.725,26.274 cw(c14.725,26.074) 14.925,26.074 14.925,25.95 ccw(c15.125,25.95) 15.125,25.75 ccw(c15.125,25.95) 15.325,25.95 15.325,26.074 cw(c15.525,26.074) 15.525,26.274 cw(c15.525,26.074) 15.725,26.074 15.725,25.95 ccw(c15.925,25.95) 15.925,25.75 ccw(c15.925,25.95) 16.125,25.95 16.125,26.074 cw(c16.325,26.074) 16.325,26.274 cw(c16.325,26.074) 16.525,26.074 16.525,25.95 ccw(c16.725,25.95) 16.725,25.75 ccw(c16.725,25.95) 16.925,25.95 16.925,26.074 cw(c17.125,26.074) 17.125,26.274 cw(c17.125,26.074) 17.325,26.074 17.325,25.95 ccw(c17.525,25.95) 17.525,25.75 ccw(c17.525,25.95) 17.725,25.95 17.725,26.074 cw(c17.925,26.074) 17.925,26.274 cw(c17.925,26.074) 18.125,26.074 18.125,25.95 ccw(c18.325,25.95) 18.325,25.75 ccw(c18.325,25.95) 18.525,25.95 18.525,26.074 cw(c18.725,26.074) 18.725,26.274 cw(c18.725,26.074) 18.925,26.074 18.925,25.95 ccw(c19.125,25.95) 19.125,25.75 ccw(c19.125,25.95) 19.325,25.95 19.325,26.074 cw(c19.525,26.074) 19.525,26.274 cw(c19.525,26.074) 19.725,26.074 19.725,25.95 ccw(c19.925,25.95) 19.925,25.75 ccw(c19.925,25.95) 20.125,25.95 20.125,26.074 cw(c20.325,26.074) 20.325,26.274 cw(c20.325,26.074) 20.525,26.074 20.525,25.75 20.525,25.351 ccw(c20.725,25.351) 20.725,25.151 ccw(c20.725,25.351) 20.925,25.351 20.925,25.75 20.925,26.074 cw(c21.125,26.074) 21.125,26.274 cw(c21.125,26.074) 21.325,26.074 21.325,25.75 21.325,25.351 ccw(c21.525,25.351) 21.525,25.151 ccw(c21.525,25.351) 21.725,25.351 21.725,25.75 21.725,26.074 cw(c21.925,26.074) 21.925,26.274 cw(c21.925,26.074) 22.125,26.074 22.125,25.95 ccw(c22.325,25.95) 22.325,25.75 22.525,25.75 22.875,25.75 23.016,25.891 23.158,26.033 cw(c23.299,25.891) 23.441,26.033 23.581,25.892 ccw(c23.723,26.034) 23.864,25.892 ccw(c23.723,26.034) 23.864,26.175 23.582,26.457 23.3,26.739 cw(c23.441,26.881) 23.3,27.022 cw(c23.441,26.881) 23.583,27.022 23.865,26.74 24.147,26.458 ccw(c24.289,26.599) 24.43,26.458 ccw(c24.289,26.599) 24.43,26.741 24.148,27.023 23.866,27.305 cw(c24.007,27.446) 23.866,27.588 cw(c24.007,27.446) 24.148,27.588 24.289,27.447 ccw(c24.431,27.588) 24.572,27.447 24.813,27.688 29.35,32.225 38.825,32.225 42.65,36.05 56.7,36.05 58.533,37.883 P5.6@58.533,46.832
  Solder Side w0.2: v1(11.4,23.2) P3.6@11.4,24.475
SD1DATA1: P3.29 P5.5 | length 78.1
  Component Side w0.2: v1(55.8,49.525) 56.325,50.05 56.75,50.05 58.533,51.833 P5.5@58.533,53.004
  Solder Side w0.2: P3.29@11.4,26.975 11.4,28.225 12.725,29.55 13.05,29.55 ccw(c13.05,29.75) 13.25,29.75 13.25,29.943 cw(c13.45,29.943) 13.45,30.143 cw(c13.45,29.943) 13.65,29.943 13.65,29.55 13.65,29.157 ccw(c13.85,29.157) 13.85,28.957 ccw(c13.85,29.157) 14.05,29.157 14.05,29.55 14.05,29.943 cw(c14.25,29.943) 14.25,30.143 cw(c14.25,29.943) 14.45,29.943 14.45,29.75 ccw(c14.65,29.75) 14.65,29.55 ccw(c14.65,29.75) 14.85,29.75 14.85,29.943 cw(c15.05,29.943) 15.05,30.143 cw(c15.05,29.943) 15.25,29.943 15.25,29.75 ccw(c15.45,29.75) 15.45,29.55 ccw(c15.45,29.75) 15.65,29.75 15.65,29.943 cw(c15.85,29.943) 15.85,30.143 cw(c15.85,29.943) 16.05,29.943 16.05,29.75 ccw(c16.25,29.75) 16.25,29.55 ccw(c16.25,29.75) 16.45,29.75 16.45,29.943 cw(c16.65,29.943) 16.65,30.143 cw(c16.65,29.943) 16.85,29.943 16.85,29.75 ccw(c17.05,29.75) 17.05,29.55 ccw(c17.05,29.75) 17.25,29.75 17.25,29.943 cw(c17.45,29.943) 17.45,30.143 cw(c17.45,29.943) 17.65,29.943 17.65,29.75 ccw(c17.85,29.75) 17.85,29.55 ccw(c17.85,29.75) 18.05,29.75 18.05,29.943 cw(c18.25,29.943) 18.25,30.143 cw(c18.25,29.943) 18.45,29.943 18.45,29.75 ccw(c18.65,29.75) 18.65,29.55 ccw(c18.65,29.75) 18.85,29.75 18.85,29.943 cw(c19.05,29.943) 19.05,30.143 cw(c19.05,29.943) 19.25,29.943 19.25,29.75 ccw(c19.45,29.75) 19.45,29.55 ccw(c19.45,29.75) 19.65,29.75 19.65,29.943 cw(c19.85,29.943) 19.85,30.143 cw(c19.85,29.943) 20.05,29.943 20.05,29.75 ccw(c20.25,29.75) 20.25,29.55 ccw(c20.25,29.75) 20.45,29.75 20.45,29.943 cw(c20.65,29.943) 20.65,30.143 cw(c20.65,29.943) 20.85,29.943 20.85,29.55 20.85,29.157 ccw(c21.05,29.157) 21.05,28.957 ccw(c21.05,29.157) 21.25,29.157 21.25,29.55 21.25,29.943 cw(c21.45,29.943) 21.45,30.143 cw(c21.45,29.943) 21.65,29.943 21.65,29.55 21.65,29.157 ccw(c21.85,29.157) 21.85,28.957 ccw(c21.85,29.157) 22.05,29.157 22.05,29.55 22.05,29.943 cw(c22.25,29.943) 22.25,30.143 cw(c22.25,29.943) 22.45,29.943 22.45,29.55 22.45,29.157 ccw(c22.65,29.157) 22.65,28.957 ccw(c22.65,29.157) 22.85,29.157 22.85,29.55 22.85,29.943 cw(c23.05,29.943) 23.05,30.143 cw(c23.05,29.943) 23.25,29.943 23.25,29.55 23.25,29.157 ccw(c23.45,29.157) 23.45,28.957 ccw(c23.45,29.157) 23.65,29.157 23.65,29.35 cw(c23.85,29.35) 23.85,29.55 25.075,29.55 30.275,34.75 44.5,34.75 55.8,46.05 v1(55.8,49.525)
SD1DATA2: P3.27 P5.3 | length 78.1
  Component Side w0.2: v1(54.075,49.7) 55.1,50.725 56.709,50.725 58.032,52.048 P5.3@58.032,53.004
  Solder Side w0.2: P3.27@10.6,26.975 10.6,29.225 12.35,30.975 12.975,30.975 ccw(c12.975,31.175) 13.175,31.175 13.175,31.375 cw(c13.375,31.375) 13.375,31.575 cw(c13.375,31.375) 13.575,31.375 13.575,30.975 13.575,30.674 ccw(c13.775,30.674) 13.775,30.474 ccw(c13.775,30.674) 13.975,30.674 13.975,30.975 13.975,31.375 cw(c14.175,31.375) 14.175,31.575 cw(c14.175,31.375) 14.375,31.375 14.375,30.975 14.375,30.674 ccw(c14.575,30.674) 14.575,30.474 ccw(c14.575,30.674) 14.775,30.674 14.775,30.975 14.775,31.375 cw(c14.975,31.375) 14.975,31.575 cw(c14.975,31.375) 15.175,31.375 15.175,30.975 15.175,30.674 ccw(c15.375,30.674) 15.375,30.474 ccw(c15.375,30.674) 15.575,30.674 15.575,30.975 15.575,31.375 cw(c15.775,31.375) 15.775,31.575 cw(c15.775,31.375) 15.975,31.375 15.975,30.975 15.975,30.674 ccw(c16.175,30.674) 16.175,30.474 ccw(c16.175,30.674) 16.375,30.674 16.375,30.975 16.375,31.375 cw(c16.575,31.375) 16.575,31.575 cw(c16.575,31.375) 16.775,31.375 16.775,30.975 16.775,30.674 ccw(c16.975,30.674) 16.975,30.474 ccw(c16.975,30.674) 17.175,30.674 17.175,30.975 17.175,31.375 cw(c17.375,31.375) 17.375,31.575 cw(c17.375,31.375) 17.575,31.375 17.575,30.975 17.575,30.674 ccw(c17.775,30.674) 17.775,30.474 ccw(c17.775,30.674) 17.975,30.674 17.975,30.975 17.975,31.375 cw(c18.175,31.375) 18.175,31.575 cw(c18.175,31.375) 18.375,31.375 18.375,30.975 18.375,30.674 ccw(c18.575,30.674) 18.575,30.474 ccw(c18.575,30.674) 18.775,30.674 18.775,30.975 18.775,31.375 cw(c18.975,31.375) 18.975,31.575 cw(c18.975,31.375) 19.175,31.375 19.175,30.975 19.175,30.674 ccw(c19.375,30.674) 19.375,30.474 ccw(c19.375,30.674) 19.575,30.674 19.575,30.975 19.575,31.375 cw(c19.775,31.375) 19.775,31.575 cw(c19.775,31.375) 19.975,31.375 19.975,31.175 ccw(c20.175,31.175) 20.175,30.975 23.375,30.975 24.375,30.975 29.875,36.475 44.675,36.475 54.075,45.875 v1(54.075,49.7)
SD1DATA3: P3.10 P5.19 | length 78.1
  Component Side w0.2: v1(9.8,23.15) 9.8,25.675 11.525,27.4 21.9,27.4 28.35,33.85 37.375,33.85 41.225,37.7 54.625,37.7 56.525,39.6 56.525,40.225 56.525,41.975 cw(c56.725,41.975) 56.725,42.175 57.195,42.175 ccw(c57.195,42.375) 57.395,42.375 ccw(c57.195,42.375) 57.195,42.575 56.725,42.575 cw(c56.725,42.775) 56.525,42.775 cw(c56.725,42.775) 56.725,42.975 57.195,42.975 ccw(c57.195,43.175) 57.395,43.175 ccw(c57.195,43.175) 57.195,43.375 56.725,43.375 cw(c56.725,43.575) 56.525,43.575 cw(c56.725,43.575) 56.725,43.775 57.195,43.775 ccw(c57.195,43.975) 57.395,43.975 ccw(c57.195,43.975) 57.195,44.175 56.725,44.175 cw(c56.725,44.375) 56.525,44.375 56.525,47.55 58,49.025 61.2,49.025 62.032,49.857 P5.19@62.032,53.004
  Solder Side w0.2: v1(9.8,23.15) P3.10@9.8,24.475
SD1DATA4: P3.4 P5.8 | length 78.1
  Component Side w0.2: v1(12.2,22.075) 12.2,23.8 13.05,24.65 14.275,24.65 ccw(c14.275,24.85) 14.475,24.85 14.475,25.035 cw(c14.675,25.035) 14.675,25.235 cw(c14.675,25.035) 14.875,25.035 14.875,24.65 14.875,24.42 ccw(c15.075,24.42) 15.075,24.22 ccw(c15.075,24.42) 15.275,24.42 15.275,24.65 15.275,25.035 cw(c15.475,25.035) 15.475,25.235 cw(c15.475,25.035) 15.675,25.035 15.675,24.65 15.675,24.42 ccw(c15.875,24.42) 15.875,24.22 ccw(c15.875,24.42) 16.075,24.42 16.075,24.65 16.075,25.035 cw(c16.275,25.035) 16.275,25.235 cw(c16.275,25.035) 16.475,25.035 16.475,24.65 16.475,24.42 ccw(c16.675,24.42) 16.675,24.22 ccw(c16.675,24.42) 16.875,24.42 16.875,24.65 16.875,25.035 cw(c17.075,25.035) 17.075,25.235 cw(c17.075,25.035) 17.275,25.035 17.275,24.65 17.275,24.42 ccw(c17.475,24.42) 17.475,24.22 ccw(c17.475,24.42) 17.675,24.42 17.675,24.65 17.675,25.035 cw(c17.875,25.035) 17.875,25.235 cw(c17.875,25.035) 18.075,25.035 18.075,24.65 18.075,24.42 ccw(c18.275,24.42) 18.275,24.22 ccw(c18.275,24.42) 18.475,24.42 18.475,24.65 18.475,25.035 cw(c18.675,25.035) 18.675,25.235 cw(c18.675,25.035) 18.875,25.035 18.875,24.65 18.875,24.42 ccw(c19.075,24.42) 19.075,24.22 ccw(c19.075,24.42) 19.275,24.42 19.275,24.65 19.275,25.035 cw(c19.475,25.035) 19.475,25.235 cw(c19.475,25.035) 19.675,25.035 19.675,24.65 19.675,24.265 ccw(c19.875,24.265) 19.875,24.065 ccw(c19.875,24.265) 20.075,24.265 20.075,24.45 cw(c20.275,24.45) 20.275,24.65 21.7,24.65 24.025,24.65 30.4,31.025 39.875,31.025 44.175,35.325 57.175,35.325 59.032,37.182 P5.8@59.032,46.832
  Solder Side w0.2: v1(12.2,22.075) P3.4@12.2,24.475
SD1DATA5: P3.2 P5.10 | length 78
  Component Side w0.2: v1(13,23.225) 14.05,23.225 ccw(c14.05,23.425) 14.25,23.425 14.25,23.625 cw(c14.45,23.625) 14.45,23.825 cw(c14.45,23.625) 14.65,23.625 14.65,23.225 14.65,22.825 ccw(c14.85,22.825) 14.85,22.625 ccw(c14.85,22.825) 15.05,22.825 15.05,23.225 15.05,23.625 cw(c15.25,23.625) 15.25,23.825 cw(c15.25,23.625) 15.45,23.625 15.45,23.225 15.45,22.825 ccw(c15.65,22.825) 15.65,22.625 ccw(c15.65,22.825) 15.85,22.825 15.85,23.225 15.85,23.625 cw(c16.05,23.625) 16.05,23.825 cw(c16.05,23.625) 16.25,23.625 16.25,23.225 16.25,22.825 ccw(c16.45,22.825) 16.45,22.625 ccw(c16.45,22.825) 16.65,22.825 16.65,23.225 16.65,23.625 cw(c16.85,23.625) 16.85,23.825 cw(c16.85,23.625) 17.05,23.625 17.05,23.225 17.05,22.825 ccw(c17.25,22.825) 17.25,22.625 ccw(c17.25,22.825) 17.45,22.825 17.45,23.225 17.45,23.625 cw(c17.65,23.625) 17.65,23.825 cw(c17.65,23.625) 17.85,23.625 17.85,23.225 17.85,22.825 ccw(c18.05,22.825) 18.05,22.625 ccw(c18.05,22.825) 18.25,22.825 18.25,23.225 18.25,23.625 cw(c18.45,23.625) 18.45,23.825 cw(c18.45,23.625) 18.65,23.625 18.65,23.225 18.65,22.825 ccw(c18.85,22.825) 18.85,22.625 ccw(c18.85,22.825) 19.05,22.825 19.05,23.225 19.05,23.625 cw(c19.25,23.625) 19.25,23.825 cw(c19.25,23.625) 19.45,23.625 19.45,23.225 19.45,22.825 ccw(c19.65,22.825) 19.65,22.625 ccw(c19.65,22.825) 19.85,22.825 19.85,23.025 cw(c20.05,23.025) 20.05,23.225 20.925,23.225 24.25,23.225 30.7,29.675 40.6,29.675 45.4,34.475 57.825,34.475 59.532,36.183 P5.10@59.532,46.832
  Solder Side w0.2: v1(13,23.225) P3.2@13,24.475
SD1DATA6: P3.33 P5.13 | length 78.1
  Component Side w0.2: v1(59.775,50.5) 60.532,51.257 P5.13@60.532,53.004
  Solder Side w0.2: P3.33@13,26.975 13,26.2 13.475,25.725 14,25.725 ccw(c14,25.925) 14.2,25.925 14.2,26.119 cw(c14.4,26.119) 14.4,26.319 cw(c14.4,26.119) 14.6,26.119 14.6,25.725 14.6,25.331 ccw(c14.8,25.331) 14.8,25.131 ccw(c14.8,25.331) 15,25.331 15,25.725 15,26.119 cw(c15.2,26.119) 15.2,26.319 cw(c15.2,26.119) 15.4,26.119 15.4,25.725 15.4,25.331 ccw(c15.6,25.331) 15.6,25.131 ccw(c15.6,25.331) 15.8,25.331 15.8,25.725 15.8,26.119 cw(c16,26.119) 16,26.319 cw(c16,26.119) 16.2,26.119 16.2,25.725 16.2,25.331 ccw(c16.4,25.331) 16.4,25.131 ccw(c16.4,25.331) 16.6,25.331 16.6,25.725 16.6,26.119 cw(c16.8,26.119) 16.8,26.319 cw(c16.8,26.119) 17,26.119 17,25.725 17,25.331 ccw(c17.2,25.331) 17.2,25.131 ccw(c17.2,25.331) 17.4,25.331 17.4,25.725 17.4,26.119 cw(c17.6,26.119) 17.6,26.319 cw(c17.6,26.119) 17.8,26.119 17.8,25.725 17.8,25.331 ccw(c18,25.331) 18,25.131 ccw(c18,25.331) 18.2,25.331 18.2,25.725 18.2,26.119 cw(c18.4,26.119) 18.4,26.319 cw(c18.4,26.119) 18.6,26.119 18.6,25.725 18.6,25.331 ccw(c18.8,25.331) 18.8,25.131 ccw(c18.8,25.331) 19,25.331 19,25.725 19,26.119 cw(c19.2,26.119) 19.2,26.319 cw(c19.2,26.119) 19.4,26.119 19.4,25.725 19.4,25.331 ccw(c19.6,25.331) 19.6,25.131 ccw(c19.6,25.331) 19.8,25.331 19.8,25.525 cw(c20,25.525) 20,25.725 21,25.725 25.15,25.725 31.275,31.85 46.625,31.85 59.1,44.325 59.1,49.825 v1(59.775,50.5)
SD1DATA7: P3.31 P5.9 | length 78
  Component Side w0.2: v1(58.625,50.85) 59.532,51.757 P5.9@59.532,53.004
  Solder Side w0.2: P3.31@12.2,26.975 12.2,27.925 12.575,28.3 14.275,28.3 ccw(c14.275,28.5) 14.475,28.5 14.475,28.7 cw(c14.675,28.7) 14.675,28.9 cw(c14.675,28.7) 14.875,28.7 14.875,28.3 14.875,27.9 ccw(c15.075,27.9) 15.075,27.7 ccw(c15.075,27.9) 15.275,27.9 15.275,28.3 15.275,28.7 cw(c15.475,28.7) 15.475,28.9 cw(c15.475,28.7) 15.675,28.7 15.675,28.3 15.675,27.9 ccw(c15.875,27.9) 15.875,27.7 ccw(c15.875,27.9) 16.075,27.9 16.075,28.3 16.075,28.7 cw(c16.275,28.7) 16.275,28.9 cw(c16.275,28.7) 16.475,28.7 16.475,28.3 16.475,27.9 ccw(c16.675,27.9) 16.675,27.7 ccw(c16.675,27.9) 16.875,27.9 16.875,28.3 16.875,28.7 cw(c17.075,28.7) 17.075,28.9 cw(c17.075,28.7) 17.275,28.7 17.275,28.3 17.275,27.9 ccw(c17.475,27.9) 17.475,27.7 ccw(c17.475,27.9) 17.675,27.9 17.675,28.3 17.675,28.7 cw(c17.875,28.7) 17.875,28.9 cw(c17.875,28.7) 18.075,28.7 18.075,28.3 18.075,27.9 ccw(c18.275,27.9) 18.275,27.7 ccw(c18.275,27.9) 18.475,27.9 18.475,28.3 18.475,28.7 cw(c18.675,28.7) 18.675,28.9 cw(c18.675,28.7) 18.875,28.7 18.875,28.3 18.875,27.9 ccw(c19.075,27.9) 19.075,27.7 ccw(c19.075,27.9) 19.275,27.9 19.275,28.3 19.275,28.7 cw(c19.475,28.7) 19.475,28.9 cw(c19.475,28.7) 19.675,28.7 19.675,28.3 19.675,27.9 ccw(c19.875,27.9) 19.875,27.7 ccw(c19.875,27.9) 20.075,27.9 20.075,28.3 20.075,28.7 cw(c20.275,28.7) 20.275,28.9 cw(c20.275,28.7) 20.475,28.7 20.475,28.5 ccw(c20.675,28.5) 20.675,28.3 23.2,28.3 25.925,28.3 31.1,33.475 47.025,33.475 58.625,45.075 v1(58.625,50.85)
SD1RESET: P3.12 P5.17 R3.2 | length 78.1
  Component Side w0.2: R3.2@9.025,20.65 9,20.675 v1(9,22.05) 9,26.9 10.275,28.175 21.375,28.175 27.9,34.7 37.075,34.7 40.775,38.4 54.1,38.4 56.025,40.325 56.025,47.825 57.65,49.45 60.825,49.45 61.532,50.157 P5.17@61.532,53.004
  Solder Side w0.2: v1(9,22.05) P3.12@9,24.475
SD2CLK: P2.8 P5.38 | length 39.6
  Component Side w0.2: v1(53.375,21.85) 53.375,23.975 55.15,25.75 63.25,25.75 64.112,26.612 cw(c64.254,26.471) 64.395,26.612 ccw(c64.537,26.754) 64.678,26.612 ccw(c64.537,26.754) 64.678,26.895 cw(c64.819,27.037) 64.678,27.178 cw(c64.819,27.037) 64.961,27.178 ccw(c65.102,27.319) 65.244,27.178 ccw(c65.102,27.319) 65.244,27.461 cw(c65.385,27.602) 65.244,27.744 cw(c65.385,27.602) 65.526,27.744 ccw(c65.668,27.885) 65.809,27.744 ccw(c65.668,27.885) 65.809,28.026 cw(c65.951,28.168) 65.809,28.309 cw(c65.951,28.168) 66.092,28.309 ccw(c66.234,28.451) 66.375,28.309 ccw(c66.234,28.451) 66.375,28.592 cw(c66.516,28.734) 66.375,28.875 66.525,29.025 66.525,46.825 P5.38@66.532,46.832
  Solder Side w0.2: P2.8@53.367,24.475 53.367,21.858 v1(53.375,21.85)
SD2CMD: P2.25 P5.35 | length 39.6
  Component Side w0.2: v1(65.1,49.55) 65.1,49.6 66.032,50.532 P5.35@66.032,53.004
  Solder Side w0.2: P2.25@52.567,26.975 52.567,28.45 ccw(c52.367,28.45) 52.367,28.65 cw(c52.367,28.85) 52.167,28.85 cw(c52.367,28.85) 52.367,29.05 52.567,29.05 52.767,29.05 ccw(c52.767,29.25) 52.967,29.25 ccw(c52.767,29.25) 52.767,29.45 cw(c52.767,29.65) 52.567,29.65 52.567,30.142 65.1,42.675 65.1,43.025 ccw(c64.9,43.025) 64.9,43.225 64.733,43.225 cw(c64.733,43.425) 64.533,43.425 cw(c64.733,43.425) 64.733,43.625 64.9,43.625 ccw(c64.9,43.825) 65.1,43.825 ccw(c64.9,43.825) 64.9,44.025 64.733,44.025 cw(c64.733,44.225) 64.533,44.225 cw(c64.733,44.225) 64.733,44.425 64.9,44.425 ccw(c64.9,44.625) 65.1,44.625 ccw(c64.9,44.625) 64.9,44.825 64.733,44.825 cw(c64.733,45.025) 64.533,45.025 cw(c64.733,45.025) 64.733,45.225 64.9,45.225 ccw(c64.9,45.425) 65.1,45.425 ccw(c64.9,45.425) 64.9,45.625 64.733,45.625 cw(c64.733,45.825) 64.533,45.825 cw(c64.733,45.825) 64.733,46.025 64.9,46.025 ccw(c64.9,46.225) 65.1,46.225 ccw(c64.9,46.225) 64.9,46.425 64.733,46.425 cw(c64.733,46.625) 64.533,46.625 cw(c64.733,46.625) 64.733,46.825 65.1,46.825 65.492,46.825 ccw(c65.492,47.025) 65.692,47.025 ccw(c65.492,47.025) 65.492,47.225 65.1,47.225 64.733,47.225 cw(c64.733,47.425) 64.533,47.425 cw(c64.733,47.425) 64.733,47.625 65.1,47.625 65.492,47.625 ccw(c65.492,47.825) 65.692,47.825 ccw(c65.492,47.825) 65.492,48.025 65.3,48.025 cw(c65.3,48.225) 65.1,48.225 v1(65.1,49.55)
SD2DATA0: P2.6 P5.40 | length 39.6
  Component Side w0.2: v1(54.175,23.275) 54.175,23.825 55.35,25 63.65,25 67.032,28.382 67.032,33.4 67.032,36.2 cw(c67.232,36.2) 67.232,36.4 67.388,36.4 ccw(c67.388,36.6) 67.588,36.6 ccw(c67.388,36.6) 67.388,36.8 67.232,36.8 cw(c67.232,37) 67.032,37 cw(c67.232,37) 67.232,37.2 67.388,37.2 ccw(c67.388,37.4) 67.588,37.4 ccw(c67.388,37.4) 67.388,37.6 67.232,37.6 cw(c67.232,37.8) 67.032,37.8 cw(c67.232,37.8) 67.232,38 67.388,38 ccw(c67.388,38.2) 67.588,38.2 ccw(c67.388,38.2) 67.388,38.4 67.232,38.4 cw(c67.232,38.6) 67.032,38.6 cw(c67.232,38.6) 67.232,38.8 67.388,38.8 ccw(c67.388,39) 67.588,39 ccw(c67.388,39) 67.388,39.2 67.232,39.2 cw(c67.232,39.4) 67.032,39.4 cw(c67.232,39.4) 67.232,39.6 67.388,39.6 ccw(c67.388,39.8) 67.588,39.8 ccw(c67.388,39.8) 67.388,40 67.232,40 cw(c67.232,40.2) 67.032,40.2 cw(c67.232,40.2) 67.232,40.4 67.388,40.4 ccw(c67.388,40.6) 67.588,40.6 ccw(c67.388,40.6) 67.388,40.8 67.232,40.8 cw(c67.232,41) 67.032,41 P5.40@67.032,46.832
  Solder Side w0.2: P2.6@54.167,24.475 54.167,24.309 54.175,24.301 v1(54.175,23.275)
SD2DATA1: P2.29 P5.39 | length 39.6
  Component Side w0.2: P5.39@67.032,53.004 67.032,48.793 v1(67.05,48.775)
  Solder Side w0.2: P2.29@54.167,26.975 54.167,29.442 55.163,30.438 56.326,31.601 cw(c56.468,31.743) 56.326,31.884 cw(c56.468,31.743) 56.609,31.884 ccw(c56.751,32.026) 56.892,31.884 ccw(c56.751,32.026) 56.892,32.167 cw(c57.033,32.308) 56.892,32.45 cw(c57.033,32.308) 57.175,32.45 ccw(c57.316,32.591) 57.458,32.45 ccw(c57.316,32.591) 57.458,32.733 cw(c57.599,32.874) 57.458,33.015 cw(c57.599,32.874) 57.74,33.015 ccw(c57.882,33.157) 58.023,33.015 ccw(c57.882,33.157) 58.023,33.298 cw(c58.165,33.44) 58.023,33.581 cw(c58.165,33.44) 58.306,33.581 ccw(c58.448,33.723) 58.589,33.581 ccw(c58.448,33.723) 58.589,33.864 cw(c58.73,34.005) 58.589,34.147 cw(c58.73,34.005) 58.872,34.147 ccw(c59.013,34.288) 59.155,34.147 ccw(c59.013,34.288) 59.155,34.43 cw(c59.296,34.571) 59.155,34.713 cw(c59.296,34.571) 59.438,34.713 ccw(c59.579,34.854) 59.72,34.713 ccw(c59.579,34.854) 59.72,34.995 cw(c59.862,35.137) 59.72,35.278 cw(c59.862,35.137) 60.003,35.278 ccw(c60.145,35.42) 60.286,35.278 ccw(c60.145,35.42) 60.286,35.561 cw(c60.427,35.702) 60.286,35.844 cw(c60.427,35.702) 60.569,35.844 ccw(c60.71,35.985) 60.852,35.844 ccw(c60.71,35.985) 60.852,36.127 cw(c60.993,36.268) 60.852,36.41 cw(c60.993,36.268) 61.135,36.41 ccw(c61.276,36.551) 61.417,36.41 ccw(c61.276,36.551) 61.417,36.692 cw(c61.559,36.834) 61.417,36.975 cw(c61.559,36.834) 61.7,36.975 ccw(c61.842,37.117) 61.983,36.975 ccw(c61.842,37.117) 61.983,37.258 cw(c62.125,37.4) 61.983,37.541 cw(c62.125,37.4) 62.266,37.541 ccw(c62.407,37.682) 62.549,37.541 ccw(c62.407,37.682) 62.549,37.824 cw(c62.69,37.965) 62.549,38.107 cw(c62.69,37.965) 62.832,38.107 ccw(c62.973,38.248) 63.114,38.107 ccw(c62.973,38.248) 63.114,38.389 cw(c63.256,38.531) 63.114,38.672 cw(c63.256,38.531) 63.397,38.672 ccw(c63.539,38.814) 63.68,38.672 ccw(c63.539,38.814) 63.68,38.955 cw(c63.822,39.097) 63.68,39.238 cw(c63.822,39.097) 63.963,39.238 ccw(c64.104,39.379) 64.246,39.238 ccw(c64.104,39.379) 64.246,39.521 cw(c64.387,39.662) 64.246,39.804 cw(c64.387,39.662) 64.529,39.804 ccw(c64.67,39.945) 64.812,39.804 ccw(c64.67,39.945) 64.812,40.087 cw(c64.953,40.228) 64.812,40.369 cw(c64.953,40.228) 65.094,40.369 ccw(c65.236,40.511) 65.377,40.369 ccw(c65.236,40.511) 65.377,40.652 cw(c65.519,40.794) 65.377,40.935 cw(c65.519,40.794) 65.66,40.935 ccw(c65.801,41.076) 65.943,40.935 ccw(c65.801,41.076) 65.943,41.218 cw(c66.084,41.359) 65.943,41.501 cw(c66.084,41.359) 66.226,41.501 ccw(c66.367,41.642) 66.509,41.501 ccw(c66.367,41.642) 66.509,41.784 66.65,41.925 67.05,42.325 v1(67.05,48.775)
SD2DATA2: P2.27 P5.37 | length 39.6
  Component Side w0.2: v1(66.125,49.45) 66.532,49.857 P5.37@66.532,53.004
  Solder Side w0.2: P2.27@53.367,26.975 53.367,29.892 65.825,42.35 65.966,42.491 66.125,42.65 66.125,42.85 66.125,43.05 cw(c66.325,43.05) 66.325,43.25 66.44,43.25 ccw(c66.44,43.45) 66.64,43.45 ccw(c66.44,43.45) 66.44,43.65 66.125,43.65 65.735,43.65 cw(c65.735,43.85) 65.535,43.85 cw(c65.735,43.85) 65.735,44.05 66.125,44.05 66.44,44.05 ccw(c66.44,44.25) 66.64,44.25 ccw(c66.44,44.25) 66.44,44.45 66.125,44.45 65.735,44.45 cw(c65.735,44.65) 65.535,44.65 cw(c65.735,44.65) 65.735,44.85 66.125,44.85 66.44,44.85 ccw(c66.44,45.05) 66.64,45.05 ccw(c66.44,45.05) 66.44,45.25 66.125,45.25 65.735,45.25 cw(c65.735,45.45) 65.535,45.45 cw(c65.735,45.45) 65.735,45.65 66.125,45.65 66.44,45.65 ccw(c66.44,45.85) 66.64,45.85 ccw(c66.44,45.85) 66.44,46.05 66.125,46.05 65.735,46.05 cw(c65.735,46.25) 65.535,46.25 cw(c65.735,46.25) 65.735,46.45 66.125,46.45 66.44,46.45 ccw(c66.44,46.65) 66.64,46.65 ccw(c66.44,46.65) 66.44,46.85 66.325,46.85 cw(c66.325,47.05) 66.125,47.05 66.125,48.475 v1(66.125,49.45)